# Altium PCB Twomes_Monitor_slave.PcbDoc
Units mm, origin at the board's own origin, x right, y up, seen from the top; angles counter-clockwise.
Board outline 16.7 x 12.16 mm, 2 copper layers (Top Layer, Bottom Layer); 4 components, 3 nets, 15 pads, 0 vias.
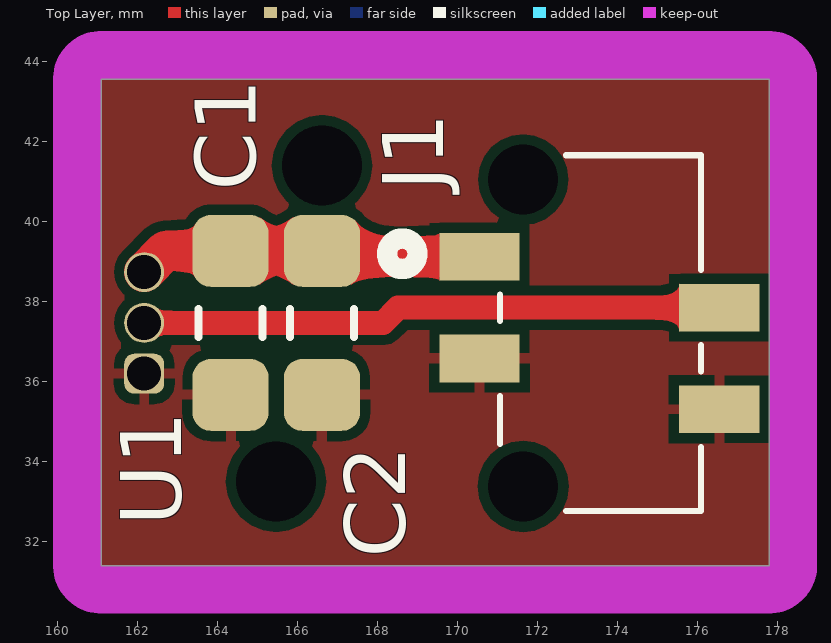
[diagram p0: Top Layer view]
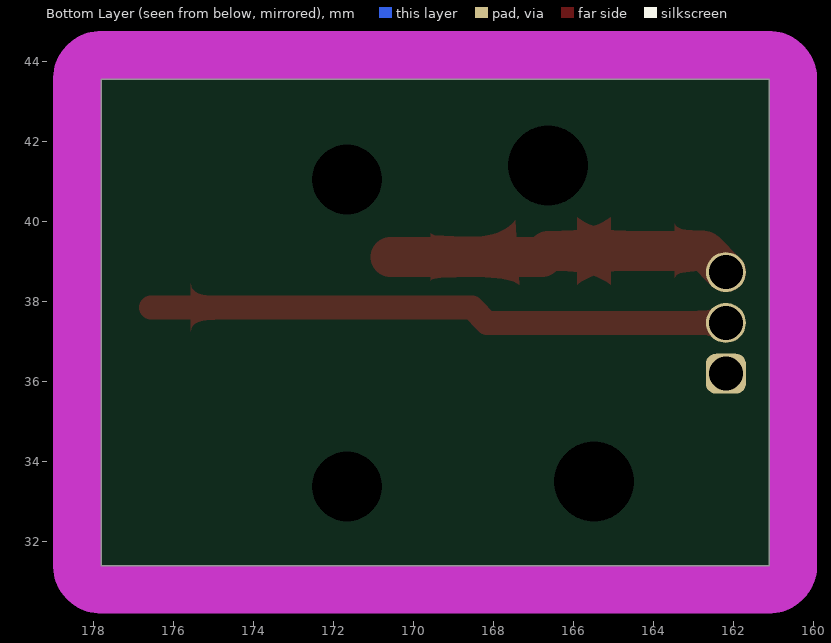
[diagram p1: Bottom Layer view, seen from below]
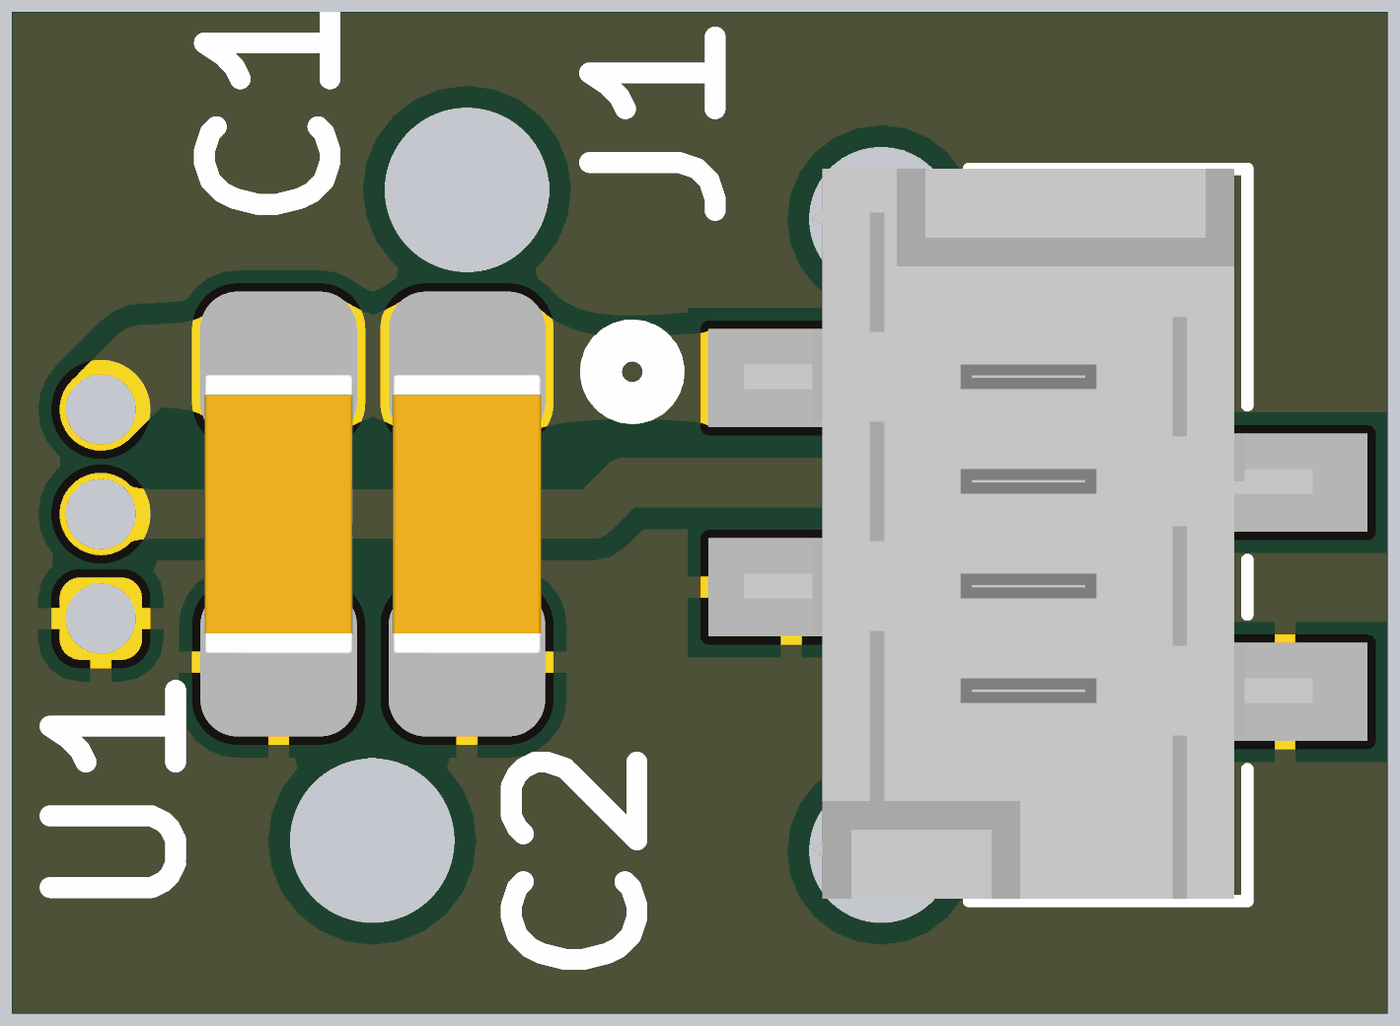
[diagram p2: 3D render of the assembled board from above, using the file's embedded part models]

## Layer stack, top to bottom
Top Solder: solder mask 0.0102, Solder Resist, Dk 3.5
Top Layer: signal copper 0.0356
Dielectric 1: dielectric 0.32, FR-4, Dk 4.8
Bottom Layer: signal copper 0.0356
Bottom Solder: solder mask 0.0102, Solder Resist, Dk 3.5

## Board outline
161.1,31.4 177.8,31.4 177.8,43.561 161.1,43.561

## Design rules (kind name [scope] priority, off if disabled: settings)
Clearance Clearance_Outline [All vs OnLayer('Keep-Out Layer')] p1: gap=0 ignorepadtopadclearanceinfootprint=FALSE
Clearance [All] p2: gap=0.254 ignorepadtopadclearanceinfootprint=FALSE except(0: Arc-Hole Track-Hole SMDPad-Hole THPad-Hole Via-Hole Fill-Hole Poly-Hole Region-Hole Text-Hole)
PolygonConnect [All] p1: connectstyle=Relief reliefconductorwidth=0.254 reliefentries=4 polygonreliefangle="90 Angle" airgapwidth=0.254
RoutingVias [All] p1: holewidth=0.711 width=1.27 viastyle="Through Hole" minholewidth=0.711 minwidth=1.27 maxholewidth=0.711 maxwidth=1.27
SolderMaskExpansion [All] p1: expansion=0.102
Width [All] p1: maxlimit=2 minlimit=0.2 preferedwidth=0.4
30 further rules are at their usual default settings.

## Components (designator, comment, footprint, x,y, rotation, side; value= is the part's Value field where it differs from the comment)
C1 "1uF" C1206 164.338,37.465 r90 top
C2 "100nF" C1206 166.624,37.465 r90 top
J1 "90814-0204" MOLEX_90814-0204 170.561,39.116 r270 top
U1 "DS18B20" TO-92_Twomes 162.179,37.465 r90 top

## Footprints (in the part's own frame and the unit in brackets; to place one, negate y for a bottom-side part, rotate by r counter-clockwise, add the part's x,y. Pads: shape width x height; smd on the part's side, far side on the other; paste and mask are expansions set on the pad)
C1206 [mm] "Chip Capacitor, 2-Leads, Body 3,20x1,60mm, IPC Medium Density"
  rrect50% 1.8x1.9 smd: 1(-1.8,0) 2(1.8,0)
  silkscreen extent -0.35,-0.8 0.35,0.8, body extent -1.7,-0.9 1.7,0.9, height 1.8
MOLEX_90814-0204 [mil]
  rect 47x79 smd: 1(0,0) 2(50,236) 3(100,0) 4(150,236)
  round 0 hole 69 unplated: 5(-76,43) 6(226,43)
  silkscreen extent -100,-91 250,218, body extent -100,-22 249,249, height 291
TO-92_Twomes [mm] "only footprint!"
  rrect50% 1x1 hole 0.85: 1(-1.27,0)
  round 1 hole 0.85: 2(0,0) 3(1.27,0)

## Part data
C1: library part 1uF,1206, "1uF, 1206", Capacitance=1uF
C2: library part 100nF,1206, "100nF, 1206", Capacitance=100nF
J1: "Pin Header, Signal, 1.27 mm, 1 Rows, 4 Contacts, Surface Mount Straight, Picoflex 90814 Series", Manufacturer=MOLEX, Manufacturer Part Number=90814-0204
U1: "Temperature Sensor IC, Digital, ± 0.5°C, -55 °C, +125 °C", Brand="MAXIM INTEGRATED PRODUCTS", Farnell_Order_Code=2515553, Farnell_Price=2,85, Mouser_Order_Code=700-DS18B20+, Mouser_Price=3,97, Type=DS18B20

## Free pads (board coordinates)
  round 0 hole 2 unplated: 0(166.624,41.4) 2(165.474,33.5)

## Nets (pads, with @x,y where several pads share a name; then routed paths per layer and width w, separated by ;. In a path a pad name is that pad's centre, name@x,y a point inside that pad or via, vN(x,y) a via of type N, cw(c..) or ccw(c..) an arc to the next point about the centre after c; other vN are vias at no path point)
Data: J1.2 U1.2 | length 14.5
  Top Layer w0.6: U1.2 168.148,37.465 168.529,37.846 J1.2
GND: C1.1 C2.1 J1.3 J1.4 U1.1
NetC1_2: C1.2 C2.2 J1.1 U1.3 | length 8.7
  Top Layer w1: U1.3 162.709,39.265 C1.2 C2.2 166.773,39.116 J1.1
pads on no net: J1.5 J1.6

## Polygon pours and split planes (outlines as drawn)
GND on Top Layer "GND_L01_P000" (solid, pour order 0): 160.6,44.3 178.5,44.3 178.5,30.5 160.6,30.5

## Keep-outs
Keep-Out Layer:
  lines w1.2: 160.5,31.4 ccw(c161.1,31.4) 161.1,30.8 ; 160.5,31.4 ccw(c161.1,31.4) 161.1,30.8 ; 160.5,31.4 160.5,43.561 ; 160.5,43.561 cw(c161.1,43.561) 161.1,44.161 ; 160.5,43.561 cw(c161.1,43.561) 161.1,44.161 ; 161.1,30.8 177.8,30.8 ; 161.1,44.161 177.8,44.161 ; 177.8,30.8 ccw(c177.8,31.4) 178.4,31.4 ; 177.8,30.8 ccw(c177.8,31.4) 178.4,31.4 ; 177.8,44.161 cw(c177.8,43.561) 178.4,43.561 ; 177.8,44.161 cw(c177.8,43.561) 178.4,43.561 ; 178.4,31.4 178.4,43.561